# EAGLE board Controller-Board_Eagle (EAGLE 7.5.0)
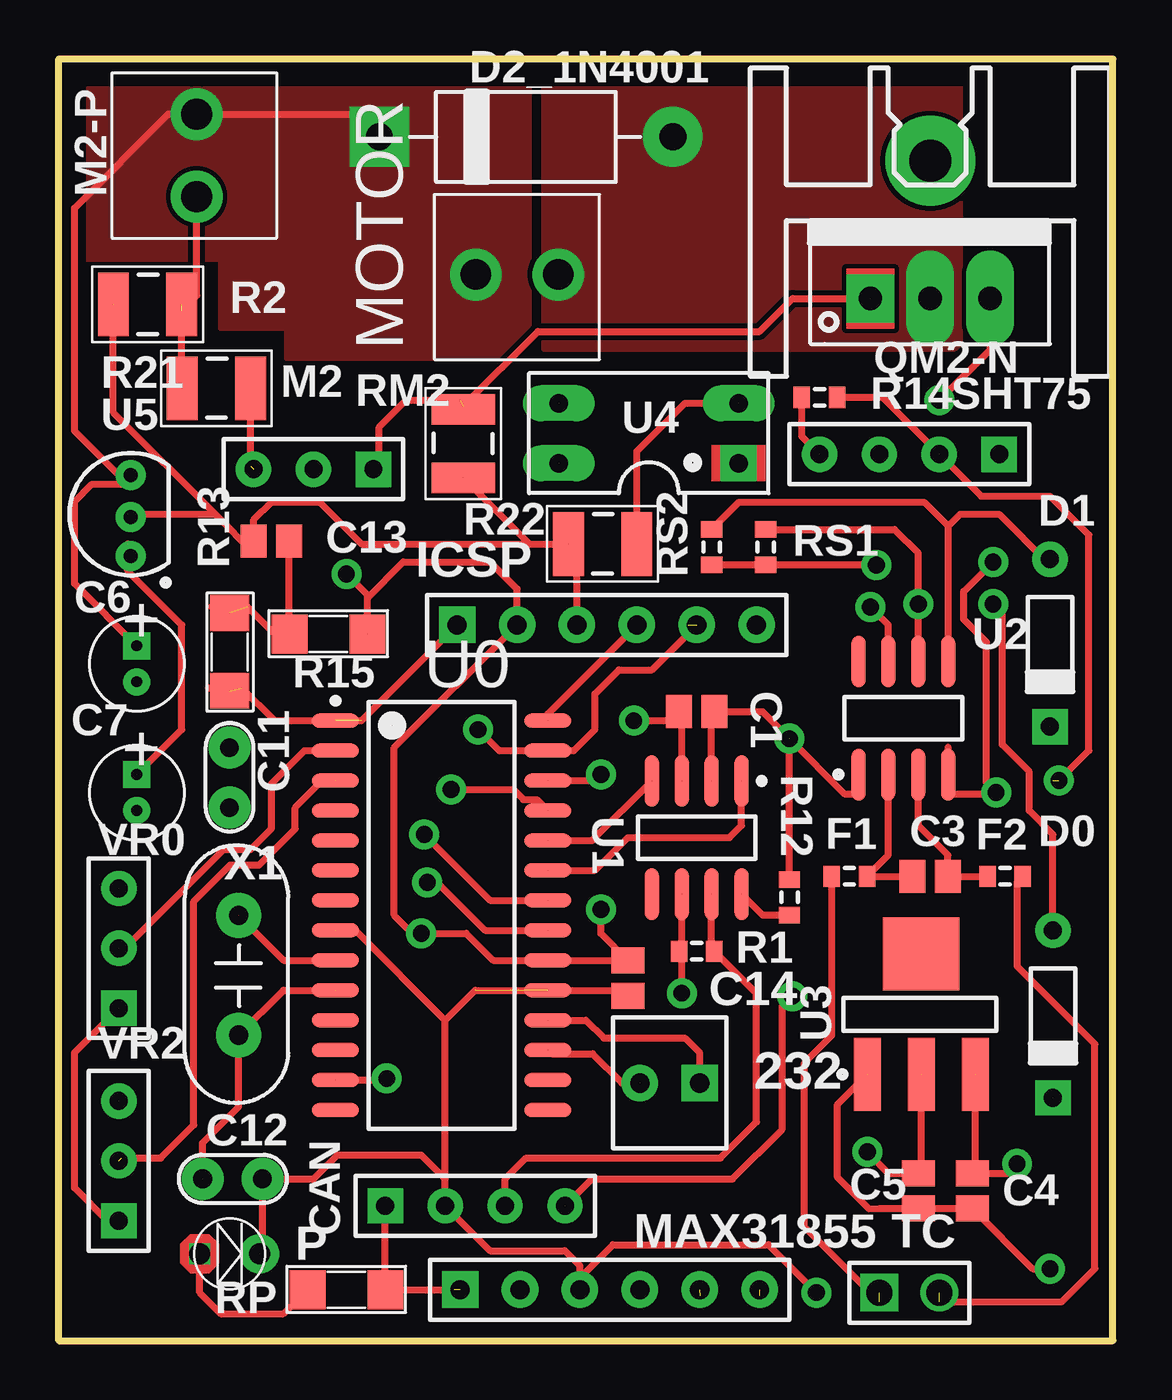
[diagram p0: board, top side]
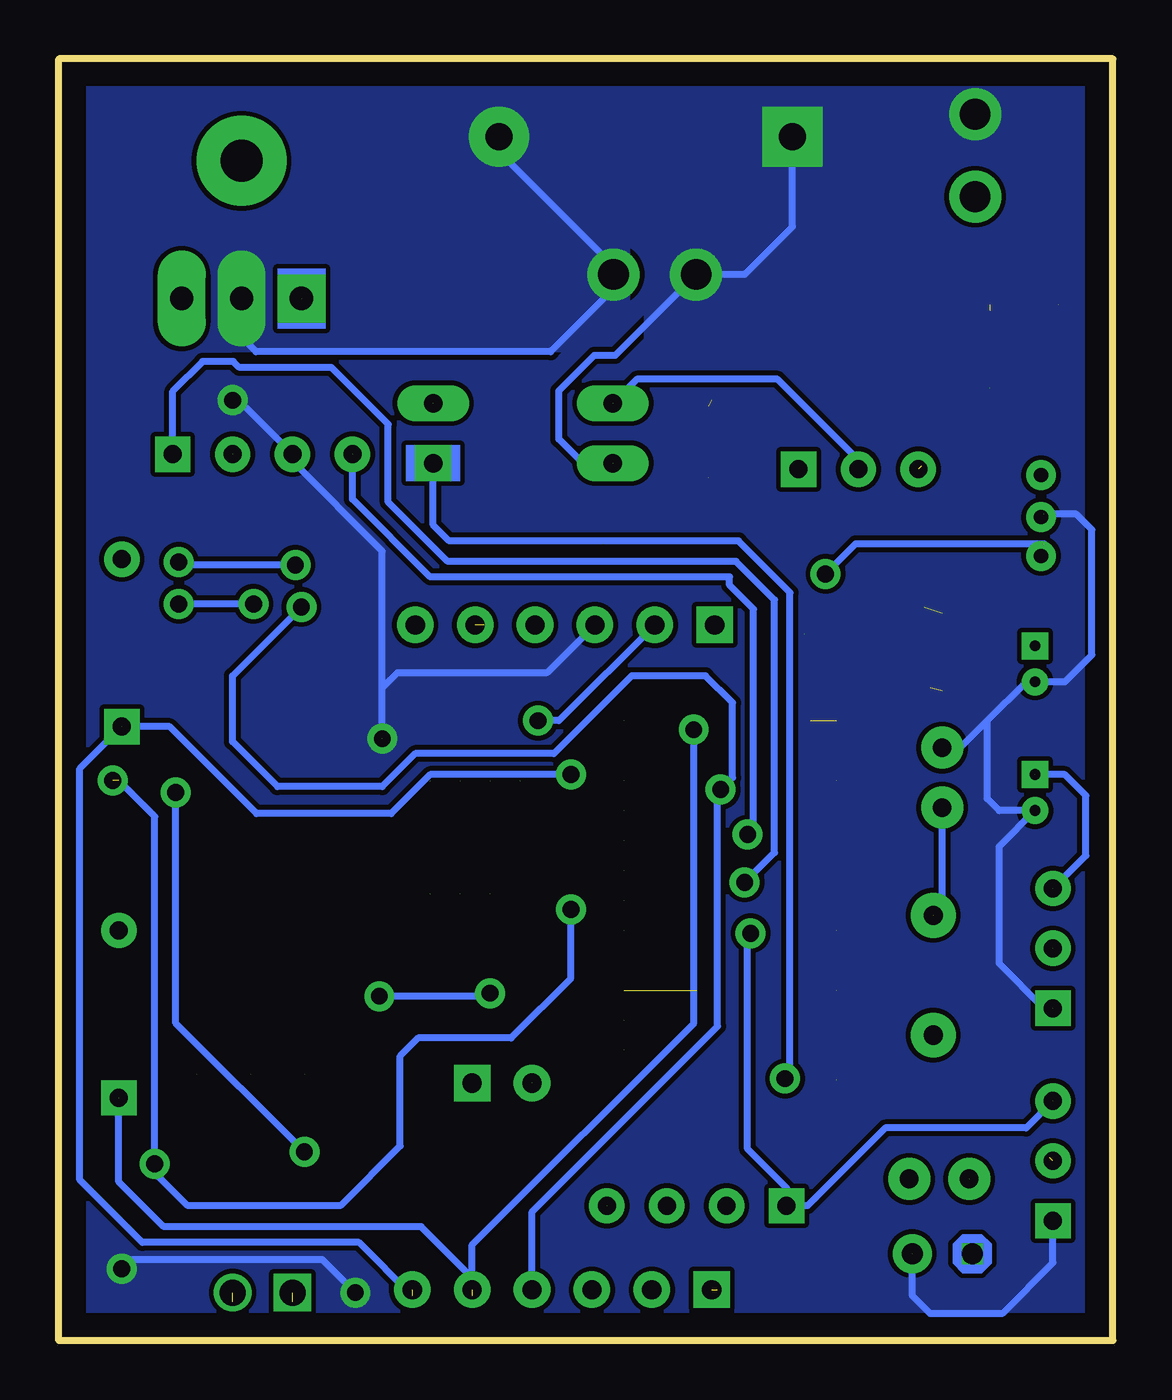
[diagram p1: board, bottom side, seen from below]

Size 44.7 x 54.36 mm. Coordinates in mm from the lower left corner, seen from the top.
Outline: 0,0 0,54.36 44.7,54.36 44.7,0 0,0
Copper layers (1*16): Top 0.035mm / dielectric 1.5mm / Bottom 0.035mm
Design rules "Sensor-Board": minimum track width 10mil, minimum drill 24mil, track to track 8mil, track to pad 8mil, pad to pad 8mil, via to via 8mil, smd to smd 8mil, copper to edge 40mil, drill to drill 8mil, minimum pad ring 0mil, minimum via ring 0mil, stop-mask expansion 4mil, vias tented up to drill 0mil, thermal gap 10mil

## Footprints (pad centres in the part's own frame; a part is rotated, then mirrored left to right if it is on the bottom)
HDR2_1PRIMARY = drill 0.813 pad 1.549 square: 1 0,0 | drill 0.813 pad 1.549: 2 2.54,0
C0805_1PRIMARY = smd 1.1 x 1.4: 1 -0.75,0; 2 0.75,0
CA-ALU-4_1PRIMARY = drill 0.457 pad 1.143 square: 1 -0.762,0 | drill 0.457 pad 1.143: 2 0.762,0
CN1_1PRIMARY = drill 0.787 pad 1.778: 1 -1.27,0; 2 1.27,0
HDR1X4_1PRIMARY = drill 0.762 pad 1.5 square: 1 0,0 | drill 0.762 pad 1.5: 2 2.54,0; 3 5.08,0; 4 7.62,0
DO-35_1PRIMARY = drill 0.762 pad 1.5: 1 -3.55,0 | drill 0.762 pad 1.5 square: 2 3.55,0
DIO-3A_1PRIMARY = drill 1.143 pad 2.54: 1 13.081,0 | drill 1.143 pad 2.54 square: 2 0.635,0
J1-0603_1PRIMARY = smd 0.7 x 0.9: 1 -0.75,0; 2 0.75,0
HDR1X6_1PRIMARY = drill 0.813 pad 1.549 square: 1 0,0 | drill 0.813 pad 1.549: 2 2.54,0; 3 5.08,0; 4 7.62,0; 5 10.16,0; 6 12.7,0
HDR1X3_1PRIMARY = drill 0.762 pad 1.5 square: 1 0,0 | drill 0.762 pad 1.5: 2 2.54,0; 3 5.08,0
KF2-3.5_1PRIMARY = drill 1.3 pad 2.2: 1 -1.75,0; 2 1.75,0
LED-3MM-YELLOW_1PRIMARY = drill 0.889 pad 0.838 square: 1 0,0 | drill 0.889 pad 1.651: 2 2.54,0
TO220H1_1PRIMARY = drill 1.778 pad 3.81: 1 0,5.842 | drill 0.991 pad 2.032 square: 2 -2.54,0 | drill 0.991 pad 2.032 long: 3 0,0; 4 2.54,0
RES-SMD-1210_1PRIMARY = smd 1.3 x 2.7: 1 -1.397,0; 2 1.503,0
SM-RES-1206_1PRIMARY = smd 1.524 x 1.651: 1 0,0; 2 3.302,0
JP2-D1T_1PRIMARY = drill 1.1 pad 1.6 square: 1 0,0 | drill 1.1 pad 1.6: 2 2.54,0
SOIC-SO28_L_1PRIMARY = smd 2 x 0.6: 1 -4.5,8.255; 2 -4.5,6.985; 3 -4.5,5.715; 4 -4.5,4.445; 5 -4.5,3.175; 6 -4.5,1.905; 7 -4.5,0.635; 8 -4.5,-0.635; 9 -4.5,-1.905; 10 -4.5,-3.175; 11 -4.5,-4.445; 12 -4.5,-5.715; 13 -4.5,-6.985; 14 -4.5,-8.255; 15 4.5,-8.255; 16 4.5,-6.985; 17 4.5,-5.715; 18 4.5,-4.445; 19 4.5,-3.175; 20 4.5,-1.905; 21 4.5,-0.635; 22 4.5,0.635; 23 4.5,1.905; 24 4.5,3.175; 25 4.5,4.445; 26 4.5,5.715; 27 4.5,6.985; 28 4.5,8.255
SOIC-SN8_N_1PRIMARY = smd 2.2 x 0.6: 1 -2.4,1.905; 2 -2.4,0.635; 3 -2.4,-0.635; 4 -2.4,-1.905; 5 2.4,-1.905; 6 2.4,-0.635; 7 2.4,0.635; 8 2.4,1.905
SOP8_-_DUPLICATE_1PRIMARY = smd 2.2 x 0.6: 1 1.283,5.969; 2 1.283,4.699; 3 1.283,3.429; 4 1.283,2.159; 5 6.083,2.159; 6 6.083,3.429; 7 6.083,4.699; 8 6.083,5.969
SOT229P700X460-4N_1PRIMARY = smd 3.1 x 1.143: 1 -2.55,2.29; 2 -2.55,0; 3 -2.55,-2.29 | smd 3.1 x 3.25: 4 2.55,0
DIP4_1PRIMARY = drill 0.787 pad 1.524 square: 1 0,0 | drill 0.787 pad 1.524 long: 2 2.54,0; 3 2.54,7.62; 4 0,7.62
PCBCOMPONENT_1_1PRIMARY = drill 0.6 pad 1.27: 1 13.335,-1.778; 2 13.335,-0.127; 3 13.335,1.651
XT2_1PRIMARY = drill 0.813 pad 1.905: 1 -2.54,0; 2 2.54,0

## Placement (x,y rotation side)
232  Header2  [HDR2_1PRIMARY]  27.18,10.92 180 top
C1  Cap_Pol3  [C0805_1PRIMARY]  27.05,26.67 0 top
C3  Cap_Pol3  [C0805_1PRIMARY]  36.96,19.69 0 top
C4  Cap_Pol3  [C0805_1PRIMARY]  38.73,6.35 270 top
C5  Cap_Pol3  [C0805_1PRIMARY]  36.45,6.35 270 top
C6  10uF/35V  [CA-ALU-4_1PRIMARY]  3.3,28.7 270 top
C7  20uF/35V  [CA-ALU-4_1PRIMARY]  3.3,23.24 270 top
C11  22pF  [CN1_1PRIMARY]  7.24,23.88 90 top
C12  22pF  [CN1_1PRIMARY]  7.37,6.86 0 top
C13  Cap_Pol3  [C0805_1PRIMARY]  9.02,33.91 180 top
C14  Cap_Pol3  [C0805_1PRIMARY]  24.13,15.37 270 top
CAN  Header_4  [HDR1X4_1PRIMARY]  13.84,5.72 0 top
D0  Diode_1N4148  [DO-35_1PRIMARY]  42.16,13.84 270 top
D1  Diode_1N4148  [DO-35_1PRIMARY]  42.04,29.59 270 top
D2_1N4001  Diode  [DIO-3A_1PRIMARY]  12.95,51.05 0 top
F1  Res3  [J1-0603_1PRIMARY]  33.53,19.69 180 top
F2  Res3  [J1-0603_1PRIMARY]  40.13,19.69 0 top
ICSP  Header_6  [HDR1X6_1PRIMARY]  16.89,30.35 0 top
M2  Header_3  [HDR1X3_1PRIMARY]  13.34,36.96 180 top
M2-P  KF2  [KF2-3.5_1PRIMARY]  5.84,50.26 270 top
MAX31855  Header_6  [HDR1X6_1PRIMARY]  17.02,2.16 0 top
MOTOR  Motor  [KF2-3.5_1PRIMARY]  19.43,45.21 0 top
P  LED  [LED-3MM-YELLOW_1PRIMARY]  5.97,3.68 0 top
QM2-N  IRF840  [TO220H1_1PRIMARY]  36.96,44.2 0 top
R1  Res3  [J1-0603_1PRIMARY]  27.05,16.51 0 top
R2  47K  [RES-SMD-1210_1PRIMARY]  3.81,43.94 180 top
R12  Res3  [J1-0603_1PRIMARY]  30.99,18.8 90 top
R13  470  [SM-RES-1206_1PRIMARY]  7.24,30.86 270 top
R14  Res3  [J1-0603_1PRIMARY]  32.26,40.01 180 top
R15  10k  [SM-RES-1206_1PRIMARY]  9.78,29.97 0 top
R21  47K  [RES-SMD-1210_1PRIMARY]  6.73,40.39 180 top
R22  10K  [RES-SMD-1210_1PRIMARY]  23.11,33.78 180 top
RM2  47K  [RES-SMD-1210_1PRIMARY]  17.15,38.1 270 top
RP  10k  [SM-RES-1206_1PRIMARY]  10.54,2.16 0 top
RS1  Res3  [J1-0603_1PRIMARY]  29.97,33.66 270 top
RS2  Res3  [J1-0603_1PRIMARY]  27.69,33.66 270 top
SHT75  Header_4  [HDR1X4_1PRIMARY]  39.88,37.59 180 top
TC  JP2  [JP2-D1T_1PRIMARY]  34.8,2.03 0 top
U0  PIC18F2480T-I/SO  [SOIC-SO28_L_1PRIMARY]  16.23,18.03 0 top
U1  MCP2551-E/SN  [SOIC-SN8_N_1PRIMARY]  27.05,21.34 270 top
U2  Component_1  [SOP8_-_DUPLICATE_1PRIMARY]  39.88,22.72 90 top
U3  Component_1  [SOT229P700X460-4N_1PRIMARY]  36.58,13.84 90 top
U4  PC817  [DIP4_1PRIMARY]  28.83,37.21 90 top
U5  LM78L05ACZ  [PCBCOMPONENT_1_1PRIMARY]  -10.29,35.05 0 top
VR0  Header_3  [HDR1X3_1PRIMARY]  2.54,14.1 90 top
VR2  Header_3  [HDR1X3_1PRIMARY]  2.54,5.08 90 top
X1  12Mhz  [XT2_1PRIMARY]  7.62,15.49 90 top

## Library data of the parts
232 C1 C3-C7 C11-C14 CAN D0 D1 D2_1N4001 F1 F2 ICSP M2 M2-P MAX31855 MOTOR P QM2-N R1 R2 R12-R15 R21 R22 RM2 RP RS1 RS2 SHT75 TC U0 U1-U5 VR0 VR2 X1 = Sensor-Board

## Nets
3.3V: C5.1 RS1.2 RS2.2 U3.2
GND1: C1.2 C4.2 C5.2 C13.2 C14.2 R2.2 R12.2 R22.2 RM2.2 U0.8 U0.19 U1.2 U3.1
NET232_1: 232.1 U0.18
NET232_2: 232.2 U0.17
NETC3_1: C3.1 F1.1
NETC3_2: C3.2 F2.1
NETC11_1: C11.1 U0.9 X1.2
NETC12_1: C12.1 U0.10 X1.1
NETC13_1: C13.1 R13.1 R15.1
NETCAN_3: CAN.3 R1.2 U1.7
NETCAN_4: CAN.4 R1.1 U1.6
NETD0_1: RS1.1
NETD0_2: D0.2 ICSP.5 MAX31855.5 U0.27
NETD1_1: RS2.1
NETD1_2: D1.2 MAX31855.6 U0.26
NETD2_1N4001_1: D2_1N4001.1 MOTOR.2 QM2-N.3
NETF1_2: F1.2 TC.1
NETF2_2: F2.2 TC.2
NETICSP_1: ICSP.1 R13.2 U0.1
NETICSP_4: ICSP.4 U0.28
NETM2-P_2: M2-P.2 R2.1 R21.2
NETM2_1: M2.1 QM2-N.2 RM2.1
NETM2_2: M2.2 U4.3
NETM2_3: M2.3 R21.1
NETMAX31855_4: U0.25
NETP_1: P.1 RP.1
NETR12_1: R12.1 U1.8
NETR14_2: R14.2 SHT75.4 U0.22
NETR22_1: R22.1 U4.2
NETSHT75_1: SHT75.1 U0.21
NETU0_2: U0.2 VR0.2
NETU0_3: U0.3 VR2.2
NETU0_13: U0.13 U4.1
NETU0_23: U0.23 U1.1
NETU0_24: U0.24 U1.4
VCC1: C1.1 C4.1 C7.1 C14.1 CAN.1 ICSP.2 MAX31855.1 R14.1 R15.2 RP.2 SHT75.2 U0.20 U1.3 U3.3 VR0.3 VR2.3
VCCP: C6.1 D2_1N4001.2 M2-P.1 MOTOR.1 U4.4

## Tracks (layer width: path | path; a pad name or v marks a point on that pad's centre or on a via)
3.3V  (via drill 0.71 pad 1.27)  (1 unrouted)
  Top 0.305: v39.62,33.02 38.38,31.78 38.38,30.58 39.34,29.62 39.34,23.65 v39.75,23.24 39.7,23.19 37.72,23.19 37.72,25.16 | v34.67,32.89 34.66,32.91 RS1.2 RS2.2 | v34.29,8 35.19,7.1 C5.1 36.58,7.23 U3.2
  Bottom 0.305: v39.62,33.02 39.5,32.89 v34.67,32.89 | v34.29,8 39.75,13.46 v39.75,23.24 39.5,23.24
GND1  (via drill 0.71 pad 1.27)  (11 unrouted)
  Top 0.305: v37.34,39.88 39.5,42.04 39.5,44.2 | 16.38,13.59 17.65,14.86 23.89,14.86 C14.2 | 16.38,13.59 12.57,17.4 U0.8 | 22.1,2.67 22.1,3.18 21.46,3.81 18.29,3.81 16.38,5.72 16.38,6.86 | v32.13,2.03 30.1,4.06 23.5,4.06 22.1,2.67 | v42.04,3.05 41.29,3.05 C4.2 C5.2 34.79,5.6 34.35,5.59 33.02,6.92 33.02,10.03 U3.1 | R12.2 v30.99,25.53 | 16.38,6.86 16.38,13.59 | 8.51,3.68 8.64,3.81 8.64,6.86 10.8,6.86 11.81,7.87 15.37,7.87 16.38,6.86 | 19.96,33.78 12.83,33.78 11.05,35.56 9.02,35.56 8.27,34.81 C13.2 8.27,33.4 6.62,35.05 | 6.62,35.05 2.31,39.36 R2.2 | RM2.2 19.96,33.78 | 19.96,33.78 R22.2 21.97,33.42 21.97,30.35 | U1.2 27.69,26.56 C1.2 29.84,26.67 v30.99,25.53 | v30.99,25.53 33.33,23.19 33.91,23.19 | 2.54,14.1 0.66,12.22 0.66,6.48 2.06,5.08 2.54,5.08 | 22.1,1.91 22.1,2.67 | 2.92,35.05 6.62,35.05
  Bottom 0.305: v30.99,25.53 30.99,27.69 | 30.99,27.69 30.99,33.48 34.8,37.29 34.8,37.59 37.08,39.88 v37.34,39.88 | 7.75,25.15 6.48,25.15 5.33,26.29 | 5.33,26.29 3.68,27.94 2.03,27.94 0.89,29.08 0.89,34.39 1.55,35.05 2.92,35.05 | 21.97,30.35 24,28.32 30.35,28.32 30.99,27.69 | 8.51,3.68 8.51,1.91 7.75,1.14 4.7,1.14 2.54,3.3 2.54,5.08 | 5.33,26.29 5.33,22.99 4.83,22.48 3.3,22.48 4.83,20.96 4.83,16 2.92,14.1 2.54,14.1 | v42.04,3.05 41.66,3.43 33.53,3.43 v32.13,2.03
  pour Bottom (no thermals): 0,54.36 44.45,54.36 44.45,0.25 44.7,0 0.25,0 0.25,53.85 0,54.1
NET232_1  (1 unrouted)
  Top 0.305: U0.18 22.35,13.59 23.11,12.83 26.54,12.83 27.18,12.19 232.1
NET232_2  (2 unrouted)
  Top 0.305: U0.17 20.89,12.17 22.63,12.17 23.88,10.92 232.2
NETC3_1
  Top 0.305: 35.18,23.19 35.18,20.59 F1.1 C3.1
NETC3_2
  Top 0.305: 36.45,23.19 36.45,21.84 37.71,20.59 C3.2 F2.1
NETC11_1  (2 unrouted)
  Top 0.305: U0.9 9.53,16.13 X1.2
  Bottom 0.305: X1.2 7.24,18.42 C11.1
NETC12_1  (2 unrouted)
  Top 0.305: C12.1 6.1,8.38 7.62,9.91 X1.1 9.53,14.86 U0.10
NETC13_1  (1 unrouted)
  Top 0.305: C13.1 9.77,29.98 R15.1 9.14,29.97 8,31.12 6.48,31.12
NETCAN_3  (1 unrouted)
  Top 0.305: U1.7 27.69,16.63 R1.2 29.59,14.72 29.59,9.27 28.07,7.75 19.81,7.75 18.92,6.86 CAN.3
NETCAN_4  (via drill 0.71 pad 1.27)  (2 unrouted)
  Top 0.305: U1.6 26.42,16.63 R1.1 26.42,16.4 v26.42,14.73 | CAN.4 22.61,6.86 28.58,6.86 30.68,8.97 30.68,14.17 v31.11,14.61
  Bottom 0.305: v31.11,14.61 26.54,14.61 v26.42,14.73
NETD0_1  (via drill 0.71 pad 1.27)
  Top 0.305: RS1.1 35.45,34.41 36.45,33.4 v36.45,31.24 36.45,28.83 | v39.62,31.24 40.01,30.86 40.01,25.27 41.15,24.13 41.15,22.48 42.16,21.46 42.16,17.39
  Bottom 0.305: v36.45,31.24 v39.62,31.24
NETD0_2  (via drill 0.71 pad 1.27)  (4 unrouted)
  Top 0.305: 26.56,30.24 26.67,30.35 | ICSP.5 25.15,28.45 23.75,28.45 22.73,27.43 22.73,25.91 21.84,25.02 U0.27 18.67,25.02 v17.78,25.91
  Bottom 0.305: 27.18,2.67 29.34,4.83 40.26,4.83 42.16,6.73 D0.2 | 27.18,2.67 27.18,4.06 17.78,13.46 v17.78,25.91 | 27.18,1.91 27.18,2.67
NETD1_1
  Top 0.305: 37.72,34.54 36.7,35.56 28.84,35.56 RS2.1 | 37.72,34.54 38.23,35.05 39.88,35.05 41.91,33.02 41.91,32.63 41.85,32.69 | 37.72,28.8 37.72,34.54
NETD1_2  (via drill 0.71 pad 1.27)  (3 unrouted)
  Top 0.305: U0.26 22.73,23.75 v22.99,24
  Bottom 0.305: v22.99,24 28.96,24 30.61,22.35 36.32,22.35 40.01,26.04 D1.2 43.82,24.26 43.82,6.81 41.17,4.17 31.98,4.17 29.72,1.91
NETD2_1N4001_1
  Top 0.305: 21.94,45.34 21.97,45.34
  Bottom 0.305: D2_1N4001.1 26.03,50.42 21.08,45.47 | MOTOR.2 21.18,44.61 23.85,41.94 36.35,41.94 36.96,42.55 QM2-N.3
  pour Top (no thermals): 20.83,54.36 38.23,54.36 38.23,42.29 37.97,42.04 20.57,42.04 20.57,54.1
  pour Bottom (no thermals): 20.57,54.36 38.23,54.36 38.23,42.16 38.1,42.04 20.57,42.04
NETF1_2  (1 unrouted)
  Top 0.305: F1.2 32.78,12.94 31.62,11.79 31.62,4.83 34.8,1.65
NETF2_2  (1 unrouted)
  Top 0.305: F2.2 40.64,19.44 40.64,15.88 43.94,12.57 43.94,3.05 42.54,1.65 37.34,1.65
NETICSP_1  (2 unrouted)
  Top 0.305: ICSP.1 12.83,26.29 9.14,26.29 7.75,27.69 6.35,27.69
NETICSP_4  (1 unrouted)
  Top 0.305: 21.21,26.29 U0.28 20.73,26.58 ICSP.4
  Bottom 0.305: ICSP.4 24.51,30.86
NETM2-P_2  (2 unrouted)
  Top 0.305: M2-P.2 5.84,44.32 5.21,43.69 5.21,40.41 R21.2
NETM2_1  (2 unrouted)
  Top 0.305: QM2-N.2 31.11,44.2 29.72,42.8 20.32,42.8 17.15,39.62 RM2.1 17.27,39.5 | 17.02,39.88 14.73,39.88 13.59,38.74 13.59,37.21 M2.1
NETM2_2  (2 unrouted)
  Top 0.305: M2.2 11.18,36.96 11.18,37.26 | 20.45,39.75 U4.3
  Bottom 0.305: U4.3 20.19,40.77 14.22,40.77 10.8,37.34 M2.2
NETM2_3  (1 unrouted)
  Top 0.305: R21.1 8.13,37.08 8.25,37.21
NETMAX31855_4  (via drill 0.71 pad 1.27)  (1 unrouted)
  Top 0.305: 35.18,28.8 35.18,30.35 v34.42,31.12 | v16.64,23.37 19.27,23.37 19.7,22.94 20.27,22.94 U0.25
  Bottom 0.305: v34.42,31.12 37.34,28.19 37.34,25.4 35.43,23.5 30.99,23.5 29.59,24.89 23.71,24.89 20.41,28.19 17.27,28.19 16.13,27.05 16.13,23.88 v16.64,23.37 16.51,23.37 16.76,23.11 16.76,13.34 24.64,5.46 24.64,1.91
NETP_1
  Top 0.305: P.1 5.97,2.03 6.86,1.14 9.53,1.14 RP.1
NETR12_1  (1 unrouted)
  Top 0.305: U1.8 29.85,18.05 R12.1
NETR14_2  (via drill 0.71 pad 1.27)  (3 unrouted)
  Top 0.305: U0.22 18.29,18.67 v15.49,21.46 | SHT75.4 31.51,38.34 R14.2
  Bottom 0.305: SHT75.4 32.26,35.69 28.96,32.39 16.26,32.39 16.26,32.04 15.24,31.02 15.24,21.46 v15.49,21.46
NETR22_1  (1 unrouted)
  Top 0.305: R22.1 24.51,37.72 26.54,39.75 U4.2
NETSHT75_1  (via drill 0.71 pad 1.27)  (1 unrouted)
  Top 0.305: U0.21 18.08,17.4 16.05,19.43 v15.62,19.43
  Bottom 0.305: v15.62,19.43 14.35,20.7 14.35,31.41 15.98,33.05 28.22,33.05 30.73,35.56 30.73,38.86 33.15,41.28 37.05,41.28 37.31,41.53 38.61,41.53 39.88,40.26 SHT75.1
NETU0_2  (1 unrouted)
  Top 0.305: U0.2 10.41,25.02 9.02,23.62 9.02,21.72 8.13,20.83 6.99,20.83 2.79,16.64 VR0.2
NETU0_3  (2 unrouted)
  Top 0.305: U0.3 11.16,23.75 10.02,22.61 10.02,21.7 8.48,20.17 7.26,20.17 5.72,18.62 5.72,9.14 4.32,7.75 2.67,7.75
NETU0_13  (via drill 0.71 pad 1.27)  (1 unrouted)
  Top 0.305: v13.91,11.11 13.84,11.05 U0.13
  Bottom 0.305: U4.1 28.83,34.59 28.15,33.91 15.88,33.91 13.69,31.73 13.69,11.46 13.97,11.18 v13.91,11.11 13.84,11.05
NETU0_23  (2 unrouted)
  Top 0.305: U0.23 22.73,19.94 24.13,21.34 28.45,21.34 28.96,21.84 U1.1
NETU0_24  (2 unrouted)
  Top 0.305: U0.24 22.62,21.21 U1.4
VCC1  (via drill 0.71 pad 1.27)  (11 unrouted)
  Top 0.305: v42.42,23.75 43.69,25.02 43.69,34.16 42.04,35.81 39.12,35.81 SHT75.2 34.92,40.01 R14.1 | U3.3 38.87,7.23 C4.1 40.25,7.1 v40.64,7.49 | 13.08,31.5 13.08,31.62 v12.19,32.51 | 13.08,31.5 14.61,33.02 18.29,33.02 19.43,31.88 ICSP.2 14.22,25.15 14.22,18.03 14.99,17.27 v15.37,17.27 17.27,17.27 18.41,16.13 U0.20 24.12,16.13 | C7.1 5.21,25.91 5.21,30.35 2.92,32.64 2.92,33.78 | U1.3 26.42,26.56 C1.1 25.92,26.29 v24.38,26.29 | R15.2 13.08,31.5 | CAN.1 RP.2 16.76,2.16 17.02,1.91 | v22.99,18.29 22.99,17.26 24.12,16.13 | 24.12,16.13 C14.1
  Bottom 0.305: 15.05,17.59 v15.37,17.27 15.49,17.15 15.49,8.13 13.84,6.48 CAN.1 12.95,5.72 9.65,9.02 3.68,9.02 VR2.3 | C7.1 2.03,24 1.14,23.11 1.14,20.57 VR0.3 | 42.16,23.75 40.64,22.23 v40.64,7.49 40.64,7.11 39.24,5.72 32.77,5.72 30.23,8.26 30.23,12.07 29.46,12.83 25.53,12.83 22.99,15.37 v22.99,18.29 | v12.19,32.51 10.92,33.78 2.92,33.78 | ICSP.2 23.5,26.29 v24.38,26.29
VCCP  (2 unrouted)
  Top 0.305: C6.1 0.66,32.11 0.66,35.59 1.4,36.32 2.92,36.32 0.66,38.58 0.66,48.03 4.64,52.01 M2-P.1 12.63,52.01 D2_1N4001.2 | U4.4 22.1,37.21
  Bottom 0.305: D2_1N4001.2 13.59,47.24 15.62,45.21 MOTOR.1 21.11,41.78 22,41.78 23.5,40.29 23.5,38.23 22.48,37.21 U4.4
  pour Top (no thermals): 0,54.36 19.94,54.36 19.94,41.66 9.65,41.66 9.65,42.93 6.86,42.93 6.86,45.85 0.13,45.85 0,45.97
  pour Bottom (no thermals): 0,54.36 19.94,54.36 19.81,54.23 19.81,41.53 9.53,41.53 9.65,41.66 9.65,42.93 6.73,42.93 6.86,43.05 6.86,45.85 0.13,45.85 0,45.97